# Altium PCB SS_MB_CONV2.0.PcbDoc (part 2 of 4)
Units mil, origin at the board's own origin, x right, y up, seen from the top; angles counter-clockwise.
Board outline 5818.45 x 4760.12 mil, 4 copper layers (Top Layer, Internal Plane 1, Internal Plane 2, Bottom Layer), stack 30.634 mil thick; 381 components, 398 nets, 1514 pads, 801 vias.
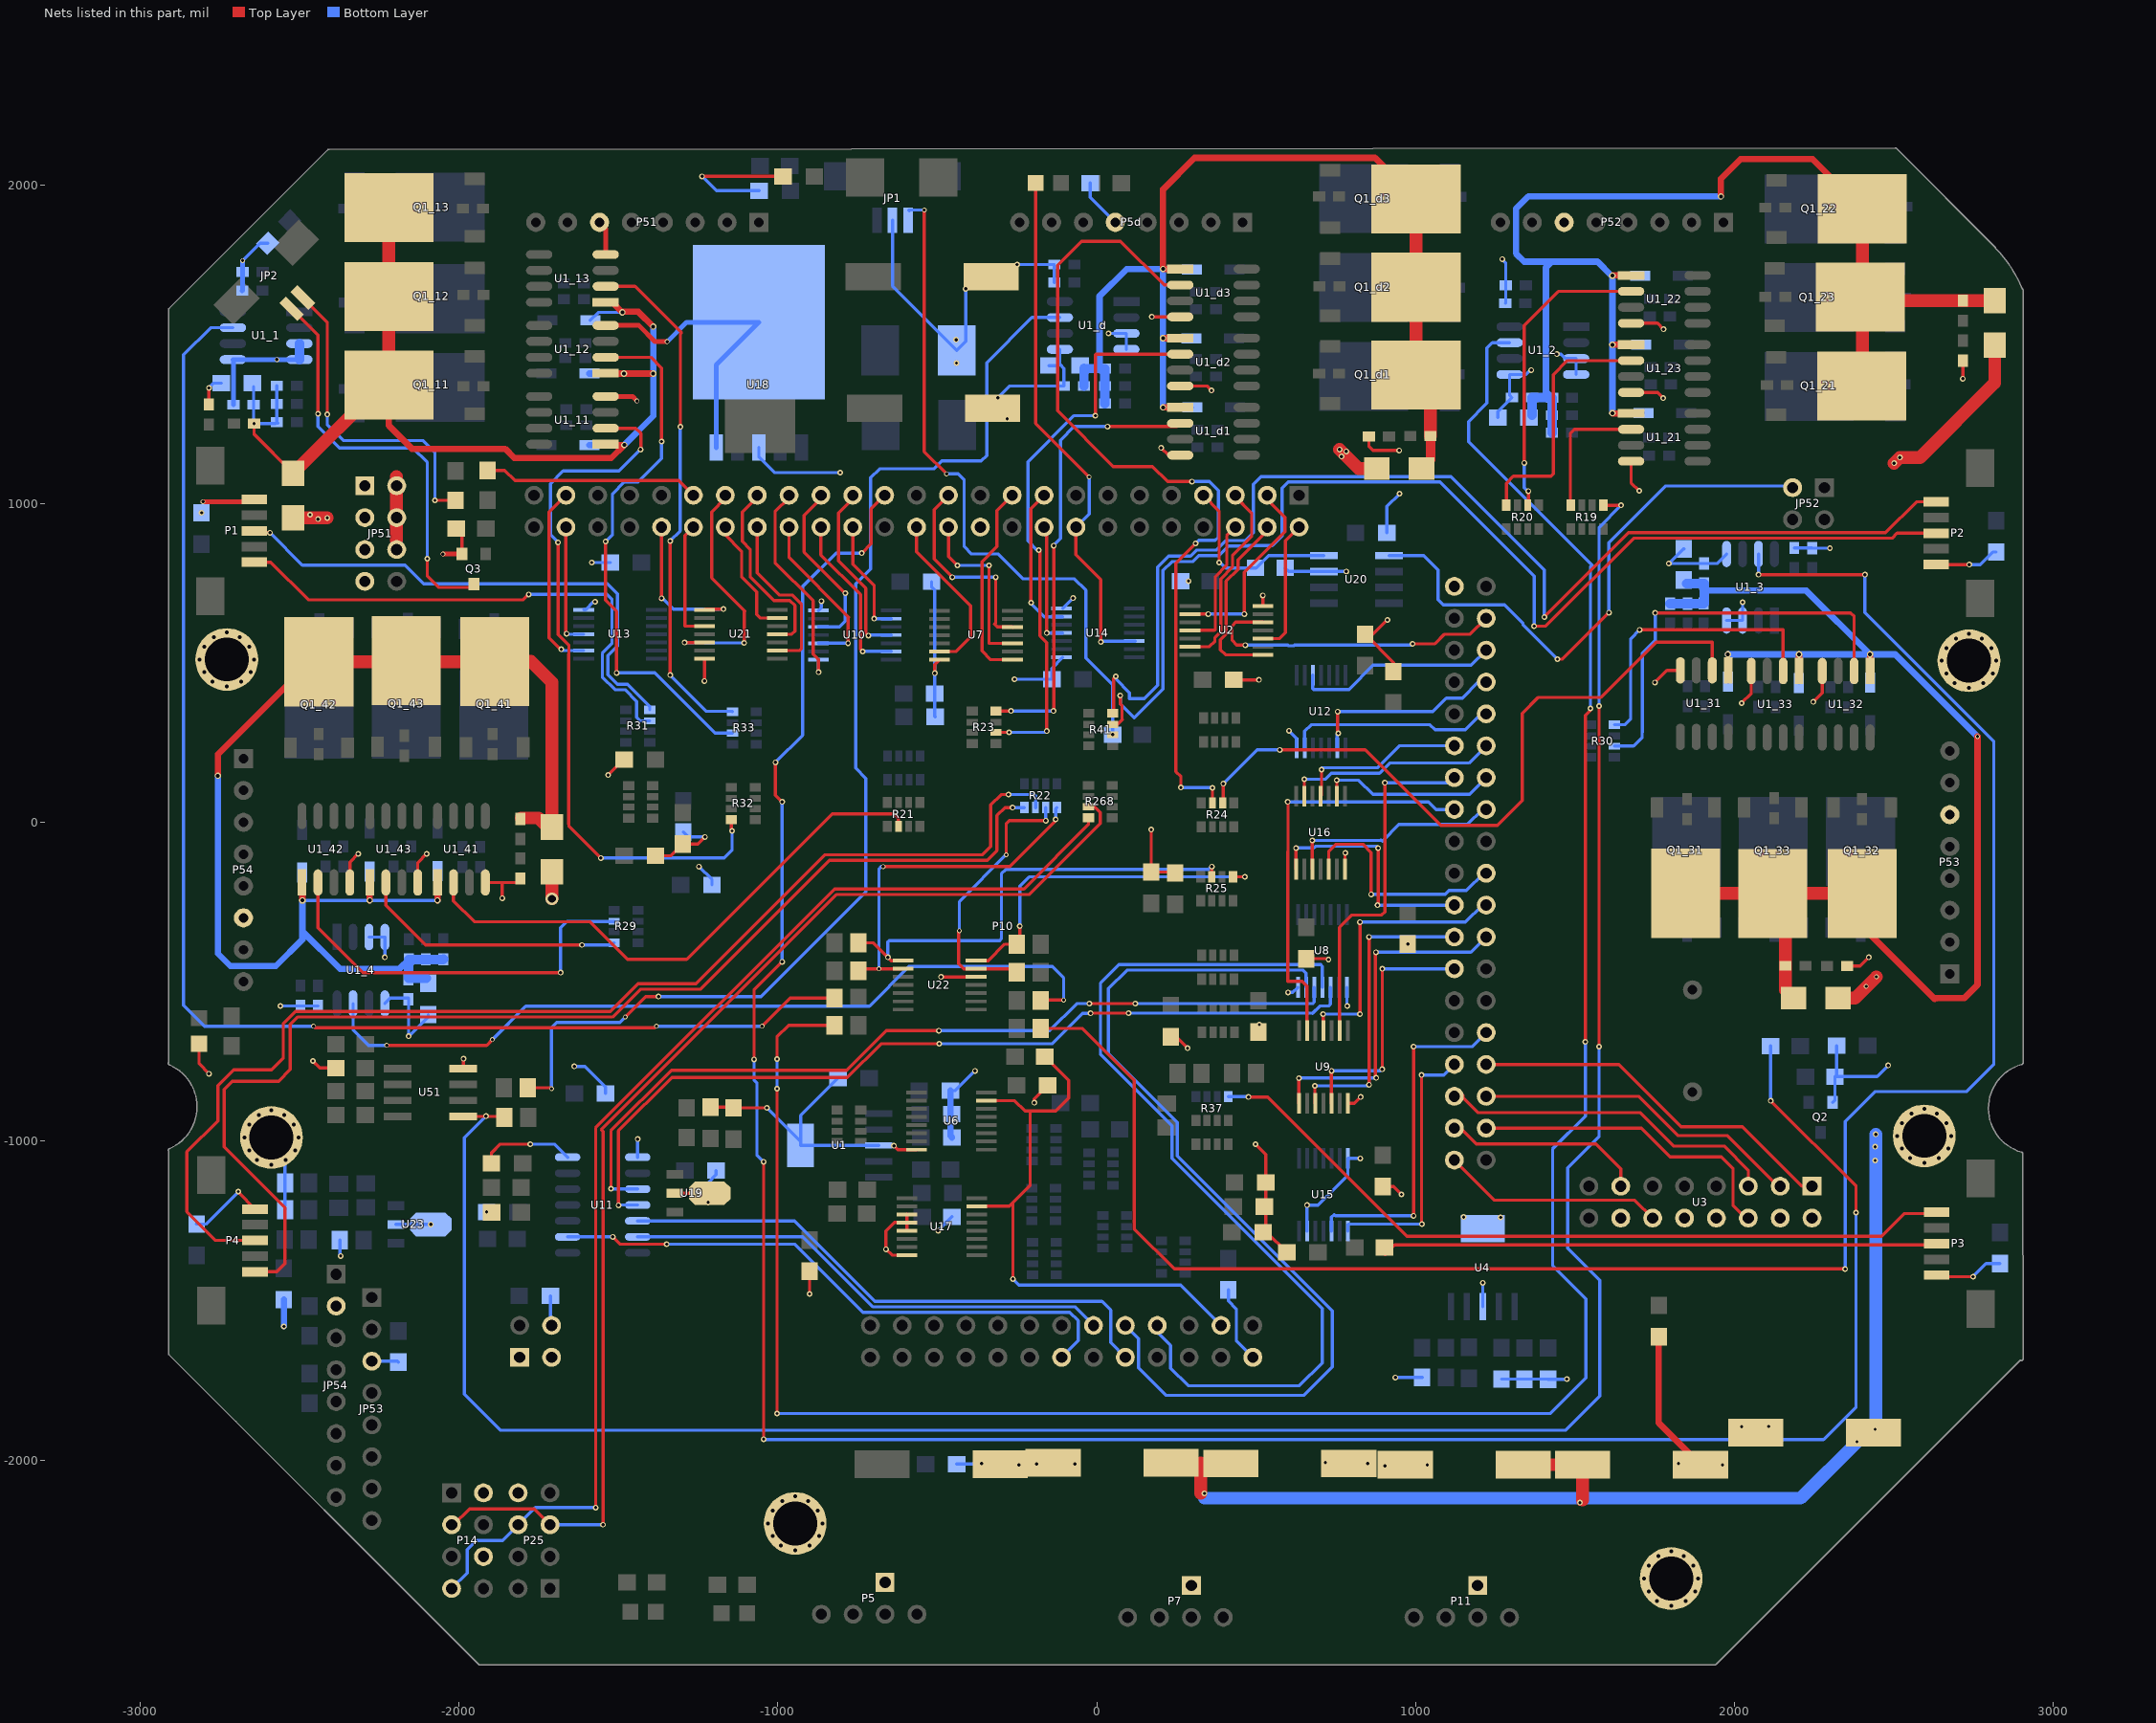
[diagram p4: the nets of this part, all layers, seen from the top]

## Via types
v1: diameter 18, hole 10, Top Layer to Bottom Layer, 606 vias
v2: diameter 25, hole 12, Top Layer to Bottom Layer, 77 vias
v3: diameter 15, hole 10, Top Layer to Bottom Layer, 44 vias
v4: diameter 20, hole 12, Top Layer to Bottom Layer, 43 vias
v5: diameter 50, hole 30, Top Layer to Bottom Layer, 28 vias
v6: diameter 30, hole 20, Top Layer to Bottom Layer, 1 vias
v7: diameter 40, hole 25, Top Layer to Bottom Layer, 1 vias
v8: diameter 30, hole 16, Top Layer to Bottom Layer, 1 vias

## Nets (pads, with @x,y where several pads share a name; then routed paths per layer and width w, separated by ;. In a path a pad name is that pad's centre, name@x,y a point inside that pad or via, vN(x,y) a via of type N, cw(c..) or ccw(c..) an arc to the next point about the centre after c; other vN are vias at no path point) (continued)
+16V2: C70.1 C71.1 C72.1 C73.1 C74.1 F2_1.1 F2_2.1 F2_3.1 F2_4.1 F2_d.1 JP51.2 JP51.4 JP51.6 | length 4734
  Top Layer w20: v1(1516,-2134) 1524,-2126
  Top Layer w40: F2_1.1@-2521,956 v1(-2414,956) ; JP51.6@-2197,885 JP51.2@-2197,1085 ; v7(-1708.73,-239.27) F2_4.1@-1708.73,-153.9 ; 326,-2105 326,-2009 ; v1(762,1171) 822,1111 F2_d.1@879,1111 ; C74.1@1338,-2015 C73.1@1524,-2015 1524,-2126 ; F2_3.1@2326,-551.06 2379,-551.06 v3(2446,-484.06) ; v1(2501.5,1127.87) v1(2519.63,1146) 2583,1146 2817,1380 F2_2.1@2817,1498
  Bottom Layer w40: 338,-2120 2208,-2120 v1(2385,-1943) 2444,-1884 v1(2444,-978)
  other v1: 338,-2105 2442,-1904 2442,-1060 2442,-1017 -2443,952 -2468,966 768,1149 783,1165
  other v3: 2414,-514
+16V2_1: C3_11.2 C3_12.2 C3_13.2 C78_1.2 C79_1.2 D1_11.A D1_12.A D1_13.A F2_1.2 LED1_1.1 Q1_11.2 Q1_12.2 Q1_13.2 U1_11.1 U1_12.1 U1_13.1 | length 3544.8
  Top Layer w10: v1(-2643.5,1252) -2643.5,1218.5 F2_1.2@-2521,1096 ; U1_11.1@-1540.34,1187.36 U1_11.1@-1537.98,1185 ; U1_12.1@-1540.34,1410 U1_12.1@-1539.34,1409
  Top Layer w20: Q1_11.2@-2220.69,1373 -2220.69,1245.69 -2148,1173 -1856,1173 -1827,1144 -1523,1144 v4(-1482,1185) U1_11.1@-1537.98,1185 ; U1_13.1@-1540.34,1632.64 -1519.68,1632.64 v4@-1490.04,1603 ; U1_12.1@-1539.34,1409 v4(-1483,1409) v4(-1391,1409) ; v4(-1488,1600.96) v4@-1490.04,1603 ; v4(-1391,1556.32) -1437.68,1603 v4@-1490.04,1603
  Top Layer w40: F2_1.2@-2521,1096 -2244,1373 Q1_11.2@-2220.69,1373 Q1_12.2@-2220.69,1650.96 Q1_13.2@-2220.69,1929.96
  Bottom Layer w10: C78_1.2@-2645,1368.5 C79_1.2@-2645,1311.5 -2645,1253.5 v1(-2643.5,1252) -2576.5,1252 C3_13.2@-2572,1256.5 ; C3_12.2@-2572,1370.5 C3_11.2@-2572,1313.5 C3_13.2@-2572,1256.5 ; C3_13.2@-2569,1253.5 C3_13.2@-2572,1256.5 ; D1_13.A@-1589,1576 -1564.04,1600.96 v4(-1488,1600.96)
  Bottom Layer w20: D1_11.A@-1592,1185 v4(-1482,1185) -1391,1276 v4(-1391,1409) v4(-1391,1556.32) ; D1_12.A@-1592,1409 v4(-1483,1409)
+16V2_2: C3_21.2 C3_22.2 C3_23.2 C78_2.2 C79_2.2 D1_21.A D1_22.A D1_23.A F2_2.2 LED1_2.1 Q1_21.2 Q1_22.2 Q1_23.2 U1_21.1 U1_22.1 U1_23.1 | length 4263.8
  Top Layer w20: v4(1618,1285) 1619,1284 U1_21.1@1676.34,1284 ; v4(1618,1499.7) U1_23.1@1676.34,1499.7 ; v4(1618,1716) 1619,1717 U1_22.1@1676.34,1717 ; v4(1958,1965) 1958,2020 2020,2082 2245.65,2082 Q1_22.2@2401.69,1925.96
  Top Layer w40: Q1_23.2@2395.69,1649.04 2401.69,1649.04 Q1_22.2@2401.69,1925.96 ; Q1_21.2@2420.5,1349.99 Q1_21.2@2400.45,1370.04 2401.69,1371.28 2401.69,1637.5 LED1_2.1@2717,1637.5 2717.5,1638 F2_2.2@2817,1638
  Bottom Layer w10: v4@1615.3,1499.7 v4(1618,1499.7) D1_23.A@1708.14,1499.7 ; v4(1618,1285) D1_21.A@1715,1285 ; v4(1618,1716) D1_22.A@1705.14,1716
  Bottom Layer w20: C3_23.2@1428.5,1333 1427.84,1333.66 1409,1352.5 1409,1742 1427,1760 ; v4(1618,1285) v4(1618,1499.7) v4@1618,1713.3 ; v4(1618,1716) 1615,1716 1571,1760 1427,1760 ; v4@1956,1965 1354,1965 1315,1926 1315,1786 1341,1760 1427,1760
  Bottom Layer w30: C78_2.2@1365.5,1278.66 C79_2.2@1365.5,1333.66 C3_23.2@1427.84,1333.66 ; C3_22.2@1428,1223.37 1428.5,1223.87 C3_23.2@1428.5,1333
+16V2_3: C3_31.2 C3_32.2 C3_33.2 C78_3.2 C79_3.2 D1_31.A D1_32.A D1_33.A F2_3.2 LED1_3.1 Q1_31.2 Q1_32.2 Q1_33.2 U1_31.1 U1_32.1 U1_33.1 | length 4349.4
  Top Layer w10: v4@1980,530.94 v4(1980,527.94) 1980,478.6 U1_31.1@1981,477.6 ; U1_33.1@2203,475.97 U1_33.1@2203.36,475.61
  Top Layer w20: U1_33.1@2203,475.97 v4(2203,527.94) ; Q1_32.2@2400.96,-222.58 2400.96,-325.96 2629,-554 2632,-551 2721,-551 2763,-509 v3(2763,270.08) ; U1_32.1@2426,475.61 v4(2426,527.94)
  Top Layer w40: Q1_31.2@1847.04,-221.74 Q1_32.2@2400.12,-221.74 ; Q1_33.2@2160.5,-262.2 LED1_3.1@2160.5,-449.06 2160.5,-525.56 F2_3.2@2186,-551.06
  Bottom Layer w10: D1_31.A@1980,441.94 v4(1980,527.94) ; D1_33.A@2203,437.94 v4(2203,527.94) ; D1_32.A@2426,439.94 v4(2426,527.94)
  Bottom Layer w20: 1905.63,728 2225.94,728 v4(2426,527.94) ; v4(1980,527.94) v4(2203,527.94) v4(2426,527.94) ; v3(2763,270.08) 2505.14,527.94 v4(2426,527.94)
  Bottom Layer w30: C3_32.2@1798.37,686.94 C3_31.2@1853.37,686.94 1903.5,686.94 C3_33.2@1904,687.44 1905.63,689.06 1905.63,728 C79_3.2@1905.63,749.94 C78_3.2@1851,749.94
+16V2_4: C3_41.2 C3_42.2 C3_43.2 C78_4.2 C79_4.2 D1_41.A D1_42.A D1_43.A F2_4.2 LED1_4.1 Q1_41.2 Q1_42.2 Q1_43.2 U1_41.1 U1_42.1 U1_43.1 | length 4301.6
  Top Layer w10: U1_42.1@-2493,-188 U1_42.1@-2492,-189 ; U1_43.1@-2281,-189 U1_43.1@-2280,-188 ; F2_4.2@-1726,-11 F2_4.2@-1708.73,-11
  Top Layer w20: v4(-2757,147) -2757,214 -2466.31,504.69 Q1_42.2@-2439.96,504.69 ; v4(-2492,-244) U1_42.1@-2492,-189 ; v4(-2281,-244) U1_43.1@-2281,-189 ; v4(-2068,-244) U1_41.1@-2068,-188
  Top Layer w40: Q1_42.2@-2439.96,504.69 -1890.04,504.69 Q1_41.2@-1889.04,505.69 -1774.69,505.69 -1708.73,439.73 -1708.73,-11 F2_4.2@-1708.73,-13.9 ; LED1_4.1@-1806,14.5 -1751.5,14.5 F2_4.2@-1726,-11
  Bottom Layer w10: D1_42.A@-2492,-157 v4(-2492,-244) v4(-2281,-244) ; D1_43.A@-2281,-153 v4(-2281,-244) ; D1_41.A@-2068,-152 v4(-2068,-244) v4(-2281,-244)
  Bottom Layer w20: v4(-2757,147) -2757,-411 -2717.94,-450.06 -2575.06,-450.06 -2492,-367 -2492,-341 ; v4(-2492,-244) -2492,-341 ; C3_42.2@-2158,-429.5 -2187.23,-458.73 -2374.27,-458.73 -2492,-341
  Bottom Layer w30: C78_4.2@-2103.5,-488 -2158.5,-488 -2158,-487.5 C3_42.2@-2158,-429.5 -2050,-429.5 C3_43.2@-2049.5,-429
+16V2_d: C3_d1.2 C3_d2.2 C3_d3.2 C78_d.2 C79_d.2 D1_d1.A D1_d2.A D1_d3.A F2_d.2 LED1_d.1 Q1_d1.2 Q1_d2.2 Q1_d3.2 U1_d1.1 U1_d2.1 U1_d3.1 | length 3623.6
  Top Layer w10: U1_d2.1@262,1519.96 U1_d2.1@262,1519.96
  Top Layer w20: v4(208,1302.96) U1_d1.1@262,1302.96 ; v4(208,1520) U1_d2.1@262,1519.96 ; U1_d3.1@262,1736.96 v4(208,1736.96) 208,1987 306.88,2085.88 872.85,2085.88 Q1_d3.2@1001.69,1957.04
  Top Layer w30: F2_d.2@1019,1111 1047,1139 LED1_d.1@1047,1213
  Top Layer w40: Q1_d3.2@1001.69,1957.04 Q1_d2.2@1001.69,1679.96 Q1_d1.2@1001.69,1404.96 1047,1359.65 LED1_d.1@1047,1213
  Bottom Layer w10: v4(208,1302.96) D1_d1.A@300.14,1303 D1_d1.A@300.14,1303 ; v4(208,1520) D1_d2.A@297.14,1519.96 D1_d2.A@297.14,1519.96 ; v4(208,1736.96) 297.18,1736.96 D1_d3.A@298.14,1736
  Bottom Layer w20: C78_d.2@-40,1425 9,1425 9,1652 93.96,1736.96 v4(208,1736.96) v4(208,1520) v4(208,1302.96)
  Bottom Layer w30: C79_d.2@-40,1370 -40,1425 -39.7,1424.7 C3_d2.2@26,1424.7 C3_d1.2@26,1369.7 C3_d3.2@26,1314.7
AB_1_F: P10.42 U21.1 | length 484
  Top Layer w10: v1@-1368,701 v1(-1365,704) -1365,926.96 P10.42@-1365.19,927.15 ; U21.1@-1230.5,667.77 -1228.23,670.04 v1(-1171,670.04)
  Bottom Layer w10: v1(-1365,704) -1361.87,704 -1327.87,670 -1183,670
AB_2_F: P10.147 U2.5 | length 986.9
  Top Layer w10: v1(466,557) 439,557 424.6,571.4 424.6,617.6 435.77,628.77 U2.5@521,628.77 ; v1(991,561) 1061,561 1091,591 1171.66,591 P10.147@1221.81,641.15
  Bottom Layer w10: v1(466,557) 599.3,557 601.3,555 618.7,555 620.7,557 987,557 v1(991,561)
AB_3_F: P10.138 U9.9 | length 1115.3
  Top Layer w10: U9.9@762,-652.5 762,-329 801,-290 894,-290 904,-280 v1(904,125)
  Bottom Layer w10: v1(904,125) 1105.66,125 P10.138@1121.81,141.15
AB_4_F: P10.32 U10.13 | length 533.7
  Top Layer w10: P10.32@-865.19,927.15 -865.19,839.81 -741,715.62 -741,544 v1(-734,537)
  Bottom Layer w10: v1(-734,537) -733.59,537.41 U10.13@-645,537.41
AB_DB_F: P10.140 U16.11 | length 536.2
  Top Layer w10: U16.11@702,82.5 705,85.5 v1(705,166)
  Bottom Layer w10: v1(705,166) 705,172 880,172 949.15,241.15 P10.140@1121.81,241.15
AD_/CS: P10.85 U11.2 | length 1847.4
  Top Layer w10: v1(-1518,-1300) -1495,-1323 v1(-1349,-1323)
  Bottom Layer w10: U11.2@-1660,-1300 v1(-1518,-1300) ; v1(-1349,-1323) -947,-1323 -733.68,-1536.32 -84.68,-1536.32 -58,-1563 -58,-1625.66 P10.85@-110.19,-1677.85
AD_CLK: P10.89 U11.12 | length 1766.8
  Bottom Layer w10: U11.12@-1440,-1250 -948,-1250 -695.68,-1502.32 16.32,-1502.32 44,-1530 44,-1632.04 P10.89@89.81,-1677.85
AD_DI: P10.88 U11.13 | length 1544.9
  Bottom Layer w10: U11.13@-1440,-1300 -922.04,-1300 -702.72,-1519.32 -68.72,-1519.32 P10.88@-10.19,-1577.85
AD_DO: U8.5 U11.10 | length 2685.9
  Top Layer w10: v1(-1524,-1149) -1524,-967 -1334,-777 -784,-777 -660,-653 v1(-495,-653) ; v1(-23,-568) v1(121,-568)
  Bottom Layer w10: v1(-1524,-1149) -1523,-1150 U11.10@-1440,-1150 ; v1(-495,-653) -148.19,-653 -63.19,-568 v1(-23,-568) ; v1(121,-568) 677,-568 682.23,-562.77 U8.5@682.23,-517
AD_DO_F: P10.90 U8.6 | length 3000.7
  Bottom Layer w10: P10.90@89.81,-1577.85 131,-1619.04 131,-1659.97 131.34,-1660.31 131.34,-1711.34 217,-1797 650,-1797 739,-1708 739,-1532 253,-1046 253,-941 37,-725 37,-521 95,-463 647.35,-463 656.64,-472.29 U8.6@656.64,-517
AD_SARS: U8.3 U11.11 | length 2745.2
  Top Layer w10: v1(-1500,-1201) -1500,-967.04 -1332.96,-800 -782.96,-800 -676.96,-694 v1(-494,-694) ; v1(-19.28,-598.28) -19,-598 v1(100,-598)
  Bottom Layer w10: v1(-1500,-1201) -1499,-1200 U11.11@-1440,-1200 ; v1(-494,-694) -140.2,-694 -44.48,-598.28 v1(-19.28,-598.28) ; v1(100,-598) 676.44,-598 676.72,-598.28 699.59,-575.41 727.59,-575.41 733.41,-569.59 U8.3@733.41,-517
AD_SARS_F: P10.92 U8.4 | length 2947.6
  Bottom Layer w10: P10.92@189.81,-1577.85 189.81,-1598.81 232,-1641 232,-1712.19 286.81,-1767 636,-1767 707,-1696 707,-1524.04 236,-1053.04 236,-952 11.8,-727.8 11.8,-503.2 69,-446 703,-446 707.82,-450.82 U8.4@707.82,-517
AT_1_F: P10.40 U21.3 | length 382.5
  Top Layer w10: P10.40@-1265.19,927.15 -1291.5,900.84 -1291.5,616.59 U21.3@-1230.5,616.59
AT_2_F: P10.2 U2.3 | length 427.5
  Top Layer w10: U2.3@521,577.59 573.59,577.59 592,596 592,884.34 P10.2@634.81,927.15
AT_3_F: P10.136 U9.13 | length 1303.1
  Top Layer w10: v1(599,65) 600,64 600,-90.28 599,-91.28 599,-498 645,-498 659.64,-512.64 U9.13@659.64,-652.5
  Bottom Layer w10: v1(599,65) 1040.3,65 1064.15,41.15 P10.136@1121.81,41.15
AT_4_F: P10.30 U10.9 | length 368.1
  Top Layer w10: P10.30@-765.19,927.15 -765.19,810.19 -698,743 v1(-698,640)
  Bottom Layer w10: v1(-698,640) -645.23,640 U10.9@-645,639.77
AT_DB_F: P10.139 U16.13 | length 667.9
  Top Layer w10: U16.13@650.82,82.5 651,82.68 v1(651,136)
  Bottom Layer w10: v1(651,136) 716.41,136 735.41,155 887.04,155 919.04,187 1167.66,187 P10.139@1221.81,241.15
BB_1_F: P10.37 U21.5 | length 776.5
  Top Layer w10: v1(-1293,565) -1230.91,565 U21.5@-1230.5,565.41 ; P10.37@-1165.19,1027.15 -1165.19,1017.81 -1208,975 -1208,768 -1104,664 -1106,662 v1(-1106,564)
  Bottom Layer w10: v1(-1293,565) -1291,567 -1288,564 v1(-1106,564)
BB_2_F: P10.4 U2.1 | length 609.6
  Top Layer w10: U2.1@521,526.41 403.59,526.41 388,542 388,573.92 406.23,592.15 406.23,657.77 406.05,657.95 406.05,757.68 443,794.63 443,824 534.81,915.81 P10.4@534.81,927.15 P10.4@558.81,927.15
BB_3_F: P10.129 U9.11 | length 877.7
  Top Layer w10: v1(710,-601) 710,-651.68 U9.11@710.82,-652.5 ; v1(826,-601) v1(826,-312)
  Bottom Layer w10: v1(710,-601) v1(826,-601) ; v1@823,-312 v1(826,-312) 1157,-312 1210.15,-258.85 P10.129@1221.81,-258.85
BB_4_F: P10.29 U10.11 | length 569.3
  Top Layer w10: P10.29@-765.19,1027.15 -765.19,1016.81 -810,972 -810,821 -724,735 -724,595 v1(-716,587)
  Bottom Layer w10: v1(-716,587) -714.41,588.59 U10.11@-645,588.59
BB_DB_F: P10.135 U16.3 | length 680.4
  Top Layer w10: v1(676,-56) 676,-143.59 675,-144.59 U16.3@676.41,-146
  Bottom Layer w10: v1(676,-56) 890,-56 891,-55 892,-56 893,-55 896,-58 948,-6 1163,-6 1210.15,41.15 P10.135@1221.81,41.15
BT_1_F: P10.38 U21.13 | length 384.5
  Top Layer w10: P10.38@-1165.19,927.15 -1165.19,903.19 -1114,852 -1114,771.04 -1067,724.04 -1067,653 -1056,642 -1002.18,642 U21.13@-1002,642.18
BT_2_F: P10.3 U2.9 | length 618.8
  Top Layer w10: U2.9@292.5,654.36 v1(349.82,654.36) ; v1(463,654.36) 463,786 590,913 590,958 534.81,1013.19 P10.3@534.81,1027.15
  Bottom Layer w10: v1(349.82,654.36) v1(463,654.36)
BT_3_F: P10.127 U9.1 | length 1087.1
  Top Layer w10: v1(634,-802) U9.1@634.05,-881 U9.1@634.05,-881 ; v1(876,-407) 874.64,-407 874.15,-406.51 874.15,-800.15 875,-801 v1(877,-801)
  Bottom Layer w10: v1(634,-802) 635,-801 v1(877,-801) ; v1(876,-407) 1173.66,-407 P10.127@1221.81,-358.85
BT_4_F: P10.31 U10.5 | length 562.4
  Top Layer w10: P10.31@-865.19,1027.15 -865.19,1016.81 -918,964 -918,849 v1(-788.96,719.96)
  Bottom Layer w10: U10.5@-873.5,614.18 -806.82,614.18 -788.96,632.04 v1(-788.96,719.96)
BT_DB_F: P10.137 U16.9 | length 560.8
  Top Layer w10: v1(753,133) 753,133.64 753.18,133.82 U16.9@753.18,82.5
  Bottom Layer w10: v1(753,133) 822,133 866,89 1169.66,89 P10.137@1221.81,141.15
BUZZER: P10.27 R3.1 | length 7922.5
  Top Layer w10: v1(-1075,-743) -1075,-525 v1(-987,-437) ; v1(-1045,-1935) v1(-1045,-1064) ; v1(-1008,189) -1008,86 v1(-987,65) ; v1(-737,845.81) -708,874.81 -708,984.34 P10.27@-665.19,1027.15 ; v1(2114,-873) 2382,-1141 v1(2382,-1224)
  Bottom Layer w10: v1(-1075,-743) -1075,-807 -1066,-816 -1066,-1043 v1(-1045,-1064) ; v1@-1045,-1936 2280,-1936 2382,-1834 v1(2382,-1224) ; v1(-1008,189) -923,274 -923,741 -818.19,845.81 v1(-737,845.81) ; v1(-987,-437) v1(-987,65) ; v1(2114,-873) R3.1@2114,-701
C_CE: P10.114 U3.12 | length 697.6
  Top Layer w10: P10.114@1121.81,-1058.85 1247.96,-1185 1688,-1185 U3.12@1744,-1241
C_CLK1: P10.117 U3.3 | length 1039.1
  Top Layer w10: P10.117@1221.81,-858.85 1699.67,-858.85 1822.82,-982 1977,-982 2136,-1141 U3.3@2144,-1141
C_CS: P10.115 U3.6 | length 1007
  Top Layer w10: P10.115@1221.81,-958.85 1708.85,-958.85 1798.7,-1048.7 1959.7,-1048.7 1996,-1085 1996,-1201 2036,-1241 U3.6@2044,-1241
C_DATA: P10.119 U3.1 | length 1189.1
  Top Layer w10: P10.119@1221.81,-758.85 1637.85,-758.85 1833,-954 2025,-954 2212,-1141 U3.1@2244,-1141
  Bottom Layer w10: P10.119@1213.15,-758.85 P10.119@1221.81,-758.85
C_DR1: P10.118 U3.5 | length 1068.3
  Top Layer w10: P10.118@1143.85,-858.85 1195,-910 1704,-910 1809,-1015 1968,-1015 2044,-1091 U3.5@2044,-1141
  Top Layer w20: P10.118@1121.81,-858.85 P10.118@1143.85,-858.85
C_PWR: P10.116 U3.13 | length 629.9
  Top Layer w10: P10.116@1121.81,-958.85 1141.85,-958.85 1191,-1008 1566,-1008 1644,-1086 U3.13@1644,-1141
CB_1_F: P10.35 U21.11 | length 602
  Top Layer w10: P10.35@-1065.19,1027.15 -1065.19,1020.81 -1112,974 -1112,883 -1087,858 -1087,771.5 -1012.5,697 -963,697 -947,681 -947,601 -957,591 U21.11@-1002,591
CB_2_F: P10.6 U2.11 | length 428
  Top Layer w10: U2.11@292.5,603.18 369.18,603.18 372.23,606.23 372.23,637.06 372.05,637.24 372.05,771.76 408,807.72 408,900.34 P10.6@434.81,927.15
CB_3_F: P10.128 U9.3 | length 958.4
  Top Layer w10: v1(684,-826) 684,-879.77 U9.3@685.23,-881 ; v1(854.15,-822.39) v1(854.15,-358.85)
  Bottom Layer w10: v1(684,-826) 850.54,-826 v1(854.15,-822.39) ; v1(854.15,-358.85) P10.128@1121.81,-358.85
CB_4_F: P10.34 U10.3 | length 536
  Top Layer w10: P10.34@-965.19,927.15 -965.19,831.19 -778,644 -780,642 v1(-780,563)
  Bottom Layer w10: U10.3@-873.5,563 v1(-780,563)
CB_DB_F: P10.130 U16.1 | length 762.7
  Top Layer w10: v1(625,-80) 625,-76.46 625.23,-76.23 U16.1@625.23,-146 ; v1(881,-259) 883,-257 v1(883,-80)
  Bottom Layer w10: v1(625,-80) v1@625,-79 ; v1@625,-78.23 v1@625,-79 ; v1@877,-259 v1(881,-259) 1121.66,-259 P10.130@1121.81,-258.85 ; v1(883,-80) 877,-74 687.7,-74 684.7,-77 682.7,-77 680.7,-79 v1@625,-79
CE: P14.7 P25.6 R268.2 | length 3773.1
  Top Layer w10: P14.7@-2023.83,-2403.22 P14.7@-2003.83,-2403.22 ; v1(-1572,-2149.22) -1572,-958 -822.5,-208.5 -228.38,-208.5 -26,-6.12 R268.2@-26,15
  Bottom Layer w10: P14.7@-2023.83,-2403.22 -1975,-2354.39 -1975,-2281.22 -1947,-2253.22 -1864,-2253.22 -1815,-2204.22 P25.6@-1815,-2203.22 -1761,-2149.22 v1(-1572,-2149.22)
CHIP: JP52.2 U20.5 | length 1814.2
  Top Layer w10: v1(1445,513) 1461,513 v1(1607,659)
  Bottom Layer w10: U20.5@917.25,838 1026,838 1071,793 1071,699 1087,683 1280,683 1337,626 1337,621.58 1445,513.58 v1(1445,513) ; v1(1607,659) 1607,879 1784,1056 2178,1056 JP52.2@2183,1051
CHIP_F: P10.7 R191.2 U20.4 | length 583.2
  Top Layer w10: P10.7@334.81,1027.15 384,977.96 v1(384,816)
  Bottom Layer w10: v1(384,816) 388,816 405,799 R191.2@498,799 499.82,799 538.82,838 U20.4@712.52,838
CON1_RESET: P10.96 R40.1 U6.15 U17.15 | length 1830.4
  Top Layer w10: U17.15@-376.5,-1203.82 -273.57,-1203.82 -263,-1193.25 ; U6.15@-346.5,-872.82 -257,-872.82 -225.01,-904.8 -209,-904.8 ; v1(-263,-1432) -263,-1193.25 ; R40.1@-163,-734 -88,-809 -88,-864 -128.8,-904.8 -209,-904.8 ; -263,-1193.25 -209,-1139.25 -209,-904.8
  Bottom Layer w10: v1(-263,-1432) -243.68,-1451.32 263.28,-1451.32 P10.96@389.81,-1577.85
CSN11: P14.3 P25.5 R268.4 | length 3805.9
  Top Layer w10: P14.3@-2023.83,-2203.22 -2018,-2203.22 -1968,-2153.22 -1765,-2153.22 P25.5@-1715,-2203.22 ; v1(-1549,-2203.22) -1549,-969.04 -1554,-964.04 -815.46,-225.5 -211.5,-225.5 11,-3 11,32 -7,50 R268.4@-26,50
  Bottom Layer w10: P14.3@-2023.83,-2203.22 P14.3@-2018,-2203.22 ; P25.5@-1715,-2203.22 v1(-1549,-2203.22)
CT_1_F: P10.36 U21.9 | length 540.1
  Top Layer w10: P10.36@-1065.19,927.15 -1065.19,783.19 -996,714 -955.96,714 -926.14,684.18 -926.14,546.86 -933.18,539.82 U21.9@-1002,539.82
CT_2_F: P10.5 U2.13 | length 612.3
  Top Layer w10: U2.13@292.5,552 353.28,552 370.59,569.31 370.59,580.55 389.23,599.19 389.23,650.73 389.05,650.91 389.05,764.72 426,801.67 426,838.33 486,898.33 486,972 434.81,1023.19 P10.5@434.81,1027.15
CT_3_F: P10.126 U9.5 | length 809.4
  Top Layer w10: U9.5@736.41,-881 736.41,-776.11 737,-776.7 v1(737,-779) ; v1(895.15,-773.85) 896,-773 v1(896,-459)
  Bottom Layer w10: v1(737,-779) 890,-779 v1(895.15,-773.85) ; v1(896,-459) 1121.66,-459 P10.126@1121.81,-458.85
CT_4_F: P10.33 U10.1 | length 669.7
  Top Layer w10: P10.33@-965.19,1027.15 -965.19,1020.15 -1009,976.34 -1009,815.12 -890,696.12 -890,528.31 -873.5,511.82 -873.5,472.5 v1(-873,472)
  Bottom Layer w10: U10.1@-873.5,511.82 -873,511.31 v1(-873,472)
CT_DB_F: P10.131 U16.5 | length 727.7
  Top Layer w10: U16.5@727.59,-146 727.59,-91.41 751,-68 835,-68 861,-94 v1(861,-225)
  Bottom Layer w10: v1(861,-225) 1093,-225 1105,-213 1160,-213 1214.15,-158.85 P10.131@1221.81,-158.85
CURRENT_1: R95.1 U1_1.7 | length 4341.9
  Top Layer w10: v3(-2457,-639) -2451.86,-644.14 -1386.14,-644.14 v3(-1381,-639) ; v3(-1050,-639) -962,-551 R95.1@-822.4,-551
  Bottom Layer w10: U1_1.7@-2710,1553 -2780,1553 -2865,1468 -2865,-573 -2799,-639 v3(-2457,-639) ; v3(-1381,-639) v3(-1050,-639)
CURRENT_2: R96.1 U1_2.7 | length 7550.3
  Top Layer w10: v1(-1003,-1854) v1(-1003,-835) ; v1(-1003,-742) -1003,-672.64 -966.36,-636 R96.1@-822.4,-636 ; v1(1533,-688) 1533,337 1549,353 v1(1549,358)
  Bottom Layer w10: v1(-1003,-1854) 1424,-1854 1535,-1743 1535,-1494.04 1430,-1389.04 1430,-1024.18 1533,-921.18 v1(1533,-688) ; v1(-1003,-835) v1(-1003,-742) ; U1_2.7@1295.34,1506 1241,1506 1224,1489 1224,1316 1220,1312 1220,1311.82 1167,1258.82 1167,1195.43 1554,808.43 1549,803.43 v1(1549,358)
CURRENT_3: R98.2 U1_3.7 | length 6216.3
  Top Layer w10: R98.2@-175.6,-646 -45,-646 118,-809 118,-1275 243,-1400 2347,-1400 v1(2348,-1401) ; v1(2076,778) v1(2410,778)
  Bottom Layer w10: v1(2076,778) U1_3.7@2076,842.94 ; v1(2348,-1401) 2348,-938 2442,-844 2730,-844 2814,-760 2814,255 2410,659 v1(2410,778)
CURRENT_4: R97.2 U1_4.7 | length 2590.6
  Top Layer w10: v3(-2227,-699) -1914,-699 v3(-1896,-681) ; R97.2@-175.6,-557.83 -174.76,-557 v3(-104,-557)
  Bottom Layer w10: U1_4.7@-2333.04,-567.66 -2333.04,-649.96 -2284,-699 v3(-2227,-699) ; v3(-1896,-681) -1791,-576 -713,-576 -589,-452 -138.67,-452 -104,-486.67 v3(-104,-557)
CURRENT_d: R99.1 U1_d.7 | length 3735.2
  Top Layer w10: R99.1@-1785.6,-832 -1713.46,-832 v3(-1710.46,-835) ; v3(-1479,-610) -1415,-546 v1(-1374.5,-546)
  Bottom Layer w10: v3(-1710.46,-835) -1710.46,-643 -1694.6,-627.14 -1496.14,-627.14 v3(-1479,-610) ; v1(-1374.5,-546) -1053,-546 -724,-217 -724,139 -756,171 -756,749 -709,796 -709,1082 -681,1110 -511,1110 -486,1135 -362,1135 -345,1152 -345,1443 -203,1585 U1_d.7@-115.66,1585
ENCODEA_1: P1.5 R31.3 | length 1676.5
  Top Layer w10: P1.5@-2643,817 -2591,817 -2473,699 -1799.31,699 v1@-1782,716.31
  Bottom Layer w10: v1(-1782,716) -1535.96,716 -1520.98,701.02 -1520.98,561.06 -1551,531.04 -1551,456.98 -1511.02,417 -1479.45,417 -1443,380.55 -1443,330 -1432,319 R31.3@-1402,319
ENCODEA_1_F: P10.48 U13.4 | length 394.3
  Top Layer w10: P10.48@-1665.19,927.15 -1665.19,590.53 -1663,592.72 v1(-1663,593)
  Bottom Layer w10: v1(-1663,593) -1661,591 U13.4@-1609.5,591
ENCODEA_2: P2.5 R41.2 | length 3753.8
  Top Layer w10: R41.2@49.8,343 56,349.2 53,352.2 53,452 v1(60,459) ; v1(1404,645) 1668.47,909.47 2474.47,909.47 2571.64,1006.64 P2.5@2633,1006.64
  Bottom Layer w10: v1(60,459) 60,450.28 103,407.28 103,389.28 103.28,389 148.95,389 191,431.05 191,802 225,836 294.04,836 313.04,855 375,855 405,885 466,885 491,910 491,1061.18 515.5,1085.68 1111.32,1085.68 1404,793 v1(1404,645)
ENCODEA_2_F: P10.18 U14.4 | length 391.2
  Top Layer w10: P10.18@-168.19,927.38 -157,916.19 -161.11,912.07 -156,906.96 -157,905.96 v1(-157,595)
  Bottom Layer w10: v1(-157,595) U14.4@-110.5,595 U14.4@-107,595
ENCODEA_3: P3.5 R37.7 | length 2455.9
  Top Layer w10: v1(476,-861) 536,-861 973,-1298 2462,-1298 2533.15,-1226.85 P3.5@2658,-1226.85
  Bottom Layer w10: R37.7@413,-860 475,-860 v1(476,-861)
ENCODEA_3_F: P10.121 U15.10 | length 1083.4
  Top Layer w10: v1(994,-1234) v1(994,-703)
  Bottom Layer w10: U15.10@736.41,-1282 736.41,-1238.41 744.82,-1230 748.82,-1234 v1(994,-1234) ; v1(994,-703) 1177.66,-703 P10.121@1221.81,-658.85
ENCODEA_4: P4.5 R22.7 | length 3753.9
  Top Layer w10: P4.5@-2640.57,-1409.43 -2572.43,-1409.43 -2546.4,-1383.4 -2546.4,-1207.6 -2737,-1017 -2737,-837 -2711.5,-811.5 -2566.65,-811.5 -2529.92,-774.77 -2529.92,-633.08 -2506.98,-610.14 -1519.06,-610.14 -1431.92,-523 -1243.5,-523 -838.5,-118 -343.23,-118 -312.8,-87.57 -312.8,22.2 -287.8,47.2 v1(-263.71,47.2)
  Bottom Layer w10: v1(-263.71,47.2) R22.7@-227,47.2
ENCODEA_4_F: P10.19 U7.8 | length 634.4
  Top Layer w10: P10.19@-265.19,1027.15 -313,979.34 -313,865.67 -360,818.67 -360,539 -332.23,511.23 U7.8@-264.5,511.23
ENCODEB_1: P1.3 R31.1 | length 1676.2
  Top Layer w10: P1.3@-2651.43,909.43 v1(-2593.43,909.43)
  Bottom Layer w10: v1(-2593.43,909.43) -2492,808 -2170,808 -2111,749 -1535.19,749 -1503.98,717.79 -1503.98,554.02 -1534,524 -1534,464.02 -1503.98,434 -1472.41,434 -1402,363.59 R31.1@-1402,354
ENCODEB_1_F: P10.47 U13.2 | length 594.4
  Top Layer w10: v1(-1680,544) -1682,544 -1718,580 -1718,974.34 P10.47@-1665.19,1027.15
  Bottom Layer w10: v1(-1680,544) -1680,543.64 -1676.18,539.82 U13.2@-1609.5,539.82
ENCODEB_2: P2.3 R41.4 | length 3730.3
  Top Layer w10: R41.4@49.8,308 65,308 80,323 79.13,323.87 79.52,324.25 79.52,367.21 74,372.73 v1(74,399) ; v1(1372,616.59) 1408.59,616.59 1684.47,892.47 2495.05,892.47 2510.79,908.21 P2.3@2633,908.21
  Bottom Layer w10: v1(74,399) 74,372.73 117.73,329 208,419.27 208,791 236,819 301.08,819 320.08,838 383,838 413,868 473.04,868 474.04,869 550.72,869 581,899.28 581,1049.36 600.31,1068.68 1076.32,1068.68 1372,773 v1(1372,616.59)
ENCODEB_2_F: P10.17 U14.6 | length 477
  Top Layer w10: v1(-206,690) -206,688 -206.72,688.72 -206.72,985.62 P10.17@-165.19,1027.15
  Bottom Layer w10: v1(-206,690) -206,688 -164.18,646.18 U14.6@-110.5,646.18 U14.6@-107,646.18
ENCODEB_3: P3.3 R42.2 | length 1743.9
  Top Layer w10: R42.2@904,-1356 934.72,-1325.28 P3.3@2635.2,-1325.28
ENCODEB_3_F: P10.120 U15.8 | length 838.8
  Top Layer w10: v1(1019,-792) 1019,-1257 1021,-1259 v1(1020,-1260)
  Bottom Layer w10: U15.8@787.59,-1282 787.59,-1262.41 790,-1260 v1(1020,-1260) ; v1(1019,-792) 1088.66,-792 P10.120@1121.81,-758.85
ENCODEB_4: P4.3 R22.5 | length 3809
  Top Layer w10: P4.3@-2640.57,-1311 -2764,-1311 -2854,-1221 -2854,-1033 -2757,-936 -2757,-825 -2708,-776 -2588,-776 -2552,-740 -2552,-631.12 -2513.88,-593 -1525.96,-593 -1438.96,-506 -1257,-506 -852,-101 -358,-101 -332.23,-75.23 -332.23,55.77 -300,88 v1(-277,88)
  Bottom Layer w10: v1(-277,88) -196,88 -192,84 R22.5@-192,47.2
ENCODEB_4_F: P10.24 U7.10 | length 548.3
  Top Layer w10: P10.24@-465.19,927.15 -465.19,835.19 v1(-437,807) ; v1(-338,807) -338,563.41 -337,562.41 U7.10@-264.5,562.41
  Bottom Layer w10: v1(-437,807) v1(-338,807)
FAULT_1: R22.1 R100.1 U22.2 | length 1116.6
  Top Layer w10: R100.1@-747.6,-465 -741.33,-458.73 U22.2@-607,-458.73 ; v3(-670,-138) -273,-138 -129,6 v1(-129,10)
  Bottom Layer w10: v3(-683,-459) -683,-145 -676,-138 v3(-670,-138) ; v1(-129,10) -129,43.2 R22.1@-125,47.2
FAULT_1_F: P10.26 U7.6 | length 530.4
  Top Layer w10: P10.26@-565.19,927.15 -565.19,850 -396,680.81 -396,583 -442.18,536.82 U7.6@-493,536.82
FAULT_2: R25.4 R101.1 U22.1 | length 1478.7
  Top Layer w10: R101.1@-747.6,-377.14 -701.27,-377.14 v1(-655.41,-423) -645.27,-433.14 U22.1@-607,-433.14 ; R25.4@361,-170.2 v1(361,-138)
  Bottom Layer w10: v1(-655.41,-423) -655.41,-374 -651.41,-370 -304,-370 -299,-365 -299,-161 -285,-147 351,-147 360,-138 v1(361,-138)
FAULT_2_F: P10.143 U12.2 | length 621.1
  Top Layer w10: v1(756,348) 756,282 v1(758,280)
  Bottom Layer w10: U12.2@754.59,234 754,234.59 754,276 v1(758,280) ; v1(756,348) 1054,348 1097,391 1147,391 1197.15,441.15 P10.143@1221.81,441.15
FAULT_3: R25.8 R102.1 U22.14 | length 1093.4
  Top Layer w10: U22.14@-378.5,-433.14 -340.14,-433.14 -288.5,-381.5 R102.1@-250.4,-381.5 -241.2,-372.3 v1(-241.2,-324.8) ; R25.8@428,-170.2 v1(464.8,-170.2)
  Bottom Layer w10: v1@-239,-327 v1(-241.2,-324.8) -241.2,-199.39 -212,-170.2 v1(464.8,-170.2)
FAULT_3_F: P10.141 U12.6 | length 657.9
  Bottom Layer w10: U12.6@652.23,234 652.23,286.46 672.77,307 1045,307 1061,291 1156,291 1206.15,341.15 P10.141@1221.81,341.15
FAULT_4: R22.3 R103.1 U22.13 | length 863.7
  Top Layer w10: v3(-431,-339) -433,-341 -433,-443 -417.27,-458.73 U22.13@-378.5,-458.73 -261.34,-458.73 R103.1@-250.4,-469.67 ; v3(-284,-101) -284,-4 -274,6 v1(-160,6)
  Bottom Layer w10: v3(-431,-339) -431,-248 v3(-284,-101) ; v1(-160,6) R22.3@-160,47.2
FAULT_4_F: P10.23 U7.12 | length 646.9
  Top Layer w10: P10.23@-465.19,1027.15 -465.19,1026.81 -510,982 -510,827 v1(-453,770) ; v1(-317,770) -317,626.59 -321,622.59 -312.41,614 -264.91,614 U7.12@-264.5,613.59 U7.12@-262.91,612
  Bottom Layer w10: v1(-453,770) v1(-317,770)
FAULT_DB: R19.8 R104.1 U51.1 | length 7646.3
  Top Layer w10: U51.1@-1988,-922 -1861.59,-922 R104.1@-1858.59,-925 ; v1(1576,-703) v1(1576,366) ; R19.8@1589,995.8 v1(1644.8,995.8)
  Bottom Layer w10: v1(-1916,-921) -1984,-989 -1984,-1793.4 -1870.4,-1907 1470.35,-1907 1578,-1799.35 1578,-1436 1478,-1336 1478,-1083 1576,-985 v1(1576,-703) ; v1(1576,366) 1576,927 v1(1644.8,995.8)
FAULT_DB_F: P10.145 U12.10 | length 637.8
  Bottom Layer w10: U12.10@677.82,462.5 677.82,420.84 680.64,418.02 791.06,418.02 867.03,494 1174.66,494 P10.145@1221.81,541.15
GND: C1.2 C2.2 C3.1 C4.2 C5.2 C6.2 C14.1 C15.1 C16.1 C17.1 C18.2 C19.1 C20.1 C21.1 C22.1 C23.1 C24.1 C25.1 C26.1 C27.1 C28.1 C29.1 C30.1 C31.1 C32.1 C33.1 C34.1 C36.1 C37.1 C38.1 C39.1 C40.2 C41.1 C43.1 C44.2 C45.1 C46.1 C47.2 C49.1 C50.1 C51.2 C52.2 C53.2 C54.2 C55.2 C56.2 C57.2 C58.2 C59.2 C60.2 C61.2 C62.2 C63.2 C64.2 C65.2 C66.2 C67.2 C69.2 C70.2 C71.2 C72.2 C73.2 C74.2 C76.1 C77.1 C78_1.1 C78_2.1 C78_3.1 C78_4.1 C78_d.1 C79_1.1 C79_2.1 C79_3.1 C79_4.1 C79_d.1 C80_1.1 C80_2.1 C80_3.1 C80_4.1 C80_d.1 C81_1.1 C81_2.1 C81_3.1 C81_4.1 C81_d.1 D4.1 DS4.2 JP1.2 JP51.1 JP51.3 JP51.5 JP51.7 JP53.3 JP54.2 P1.1 P2.1 P3.1 P4.1 P5.1 P5d.5 P7.1 P10.22 P10.51 P10.53 P10.54 P10.97 P10.150 P11.1 P14.2 P14.6 P15.1 P16.1 P17.1 P18.1 P19.1 P20.1 P25.8 P51.6 P52.6 P53.6 P54.6 Q2.2 Q3.2 R4.2 R7.2 R8.2 R14.1 R48.2 R94.1 R105_1.1 R105_2.1 R105_3.1 R105_4.1 R105_d.1 R184.2 R190.1 R191.1 U1.3 U1.6 U1_1.3 U1_1.4 U1_1.5 U1_2.3 U1_2.4 U1_2.5 U1_3.3 U1_3.4 U1_3.5 U1_4.3 U1_4.4 U1_4.5 U1_11.4 U1_12.4 U1_13.4 U1_21.4 U1_22.4 U1_23.4 U1_31.4 U1_32.4 U1_33.4 U1_41.4 U1_42.4 U1_43.4 U1_d1.4 U1_d2.4 U1_d3.4 U1_d.3 U1_d.4 U1_d.5 U2.7 U3.2 U3.4 U3.8 U3.10 U3.14 U4.3 U4.6 U6.8 U7.7 U8.1 U8.7 U9.7 U10.7 U11.7 U11.8 U12.7 U13.7 U14.1 U14.7 U15.7 U15.13 U16.7 U17.3 U17.4 U17.5 U17.8 U18.3 U18.5 U18.6 U19.2 U19.4 U20.3 U21.7 U22.12 U23.2 U23.4 U51.4 | length 16501.3
  Top Layer w10: DS4.2@-2816,-694 -2816,-757 v1(-2785,-788) ; R105_1.1@-2785,1312.5 v1(-2785,1364) ; v1(-2693,-1158) -2693,-1160.15 P4.1@-2640.57,-1212.57 ; v1(-2459,-748) -2437,-770 R184.2@-2387,-770 ; U1_42.4@-2343,-188 -2343,-123.94 v1(-2317,-97.94) ; U1_43.4@-2130,-188 -2130,-126 v1(-2102,-98) ; R7.2@-2009,923 -1991.4,905.4 Q3.2@-1991.4,842.49 ; U51.4@-1988,-772 -1986.5,-770.5 v1(-1986.5,-741) ; U1_41.4@-1918,-188 -1865,-188 ; C29.1@-1899,-1069 -1899,-1037 -1871,-1009 v1(-1777,-1009) ; v1(-1865,-237.27) -1865,-188 ; R105_4.1@-1807.73,-175.4 -1820.33,-188 -1865,-188 ; v1(-1533,149) -1485,197 C58.2@-1482,197 ; C64.2@-1384,-104 -1335.13,-104 C60.2@-1298,-66.87 -1250.87,-66.87 v1(-1229,-45) ; U19.2@-1323.25,-1163 U19.4@-1214,-1163 ; v1(-1238,2028) C3.1@-984,2028 ; v1(-1230.5,444.45) U21.7@-1230.5,514.23 ; C17.1@-1212,-893 -1142,-893 C16.1@-1140,-895 v1(-1035,-895) ; v1(-901,-1479) C39.1@-901,-1408 ; v1(-636,-1014) -623.64,-1026.36 U6.8@-565,-1026.36 ; U17.8@-595,-1357.36 -642.64,-1357.36 v1(-661,-1339) -661,-1281 -635,-1255 U17.4@-595,-1255 ; U17.5@-595,-1280.59 U17.4@-595,-1255 ; U17.3@-595,-1229.41 U17.4@-595,-1255 ; v1(-508,469) -508,496.23 U7.7@-493,511.23 ; v1(-488.68,-484.32) U22.12@-378.5,-484.32 ; v1(-196,-879) -196,-867 C38.1@-154,-825 ; P5d.5@35,1883.58 P5d.5@58.27,1883.58 ; v1(171,-22.14) C53.2@171,-155 243,-155 C55.2@246,-158 ; v1(173,1586.96) U1_d3.4@262,1586.96 ; v1(202,1176) 225.04,1152.96 U1_d1.4@262,1152.96 ; C66.2@232,-672 249,-672 v1(285,-708) ; U1_d2.4@262,1369.96 346.04,1369.96 v1(360,1356) v1@362,1354 ; C52.2@430,448 v1(509,448) ; v1(498,-1009) 530,-1041 C57.2@530,-1129.28 530,-1278 C63.2@522,-1286 534,-1286 C24.1@596,-1348 ; U2.7@521,679.95 v1(521,713) ; C59.2@657,-427 724,-427 v1(727,-430) ; U16.7@778.77,-146 778.77,-104.23 ; U9.7@787.59,-881 808,-881 v1(828,-861) ; R105_d.1@854,1212 854,1180.11 866.11,1168 v1(949,1168) ; C15.1@896.91,-1141.72 930.72,-1141.72 v1(956,-1167) ; v1(912,636) 867,591 C31.1@842,591 931,502 C20.1@931,474 ; U1_21.4@1676.34,1134 1676.34,1066.66 v1(1702,1041) ; U1_23.4@1676.34,1349.7 1759.3,1349.7 v1(1777,1332) ; U1_22.4@1676.34,1567 1759,1567 v1(1778,1548) ; v1(1751,439.73) 1788.87,477.6 U1_31.4@1831,477.6 ; v1(2023,375) 2053.36,405.36 U1_33.4@2053.36,475.61 ; v1(2248,379) 2276,407 U1_32.4@2276,475.61 ; R105_3.1@2354.5,-450.06 2394.94,-450.06 v1(2422,-423) ; P2.1@2633,809.79 v1(2737.21,809.79) ; P3.1@2635.2,-1424.7 v1(2749.3,-1424.7) ; v1(2717,1393) R105_2.1@2717,1449.5
  Top Layer w15: v3(-2803.79,1007.21) P1.1@-2643,1007.21 ; v3(-2051,842.49) Q3.2@-1991.4,842.49 ; P51.6@-1559.73,1883.58 -1540.34,1864.19 U1_13.4@-1540.34,1782.64 ; U1_11.4@-1540.34,1337.36 -1456.36,1337.36 v3(-1442,1323) ; U1_12.4@-1540.34,1560 -1436.42,1560 -1385.42,1509 v3(-1347.5,1509)
  Top Layer w20: C26.1@1763,-1613 1763,-1884 C73.2@1894,-2015
  Bottom Layer w10: C46.1@-2824,-1260 -2795,-1260 v1(-2693,-1158) ; v1(-2785,1364) -2770,1379 C78_1.1@-2746.67,1379 ; v3(-2679.5,1763.5) -2624.83,1818.17 C43.1@-2600.83,1818.17 ; P16.1@-2589,-988 P16.1@-2546.4,-1030.6 ; v1(-2561,-575.5) C81_4.1@-2443.04,-575.5 ; C77.1@-2546.4,-1215 C76.1@-2546.4,-1131 P16.1@-2546.4,-1030.6 ; P16.1@-2546.4,-993.6 P16.1@-2546.4,-1030.6 ; R94.1@-2374.4,-1310 -2374.4,-1360 v1(-2372,-1360) ; U1_4.3@-2283.04,-359 U1_4.4@-2233.04,-359 U1_4.4@-2233.04,-359 v1(-2233,-423) ; JP53.3@-2281,-1697 JP53.3@-2274,-1690 -2194,-1690 C41.1@-2191,-1693 ; U1_4.5@-2233.04,-567.66 -2216.38,-551 -2158.5,-551 v1(-2158.5,-670.5) -2097,-609 C78_4.1@-2097,-602.28 ; U23.2@-2198.25,-1261 v1(-2089,-1261) ; v1(-1777,-1009) -1701,-1009 U11.7@-1660,-1050 ; C36.1@-1714,-1485 -1714,-1574.04 P10.54@-1710.19,-1577.85 ; v1(-1639,-765) -1606,-765 -1541,-830 C33.1@-1541,-850 ; U13.7@-1609.5,667.77 -1603.23,667.77 -1578,693 v1(-1574,693) ; v1(-1584.5,816) C21.1@-1526,816 ; U11.8@-1440,-1050 v1(-1440,-993) ; C62.2@-1297,-30 -1282,-45 v1(-1229,-45) ; v1(-1248,-138) -1207,-179 C34.1@-1207,-195 ; v1(-1238,2028) -1193,1983 C18.2@-1059,1983 ; v1(-1219,-1192) -1219,-1130 -1194,-1105 C14.1@-1194,-1092 ; U18.3@-1060,1176.66 -1060,1148 -1010,1098 v1(-805,1098) ; v1(-1035,-895) U1.6@-929,-1001 ; U10.7@-873.5,665.36 -864,674.86 v1(-864,695) ; C27.1@-812,-802 -929,-919 U1.6@-929,-1001 ; U1.3@-684,-1013 U1.6@-929,-1013 U1.6@-929,-1001 ; JP1.2@-640.51,1890.2 -640.51,1683.59 D4.1@-439,1482.08 -411,1510.08 v1(-411,1675) ; C22.1@-518,756 -518,739 -508,729 v1(-508,469) C54.2@-508,405 -508,333 C44.2@-507,332 ; v1(-497.59,-1280.59) R8.2@-454,-1237 ; C6.2@-459,-841 -444,-841 v1(-382,-779) ; C5.2@-439,-2013 v1@-361,-2013 ; v1(-310,1333) -273,1370 C79_d.1@-103,1370 -103,1425 -115.66,1437.66 ; v1(-258,450) C25.1@-141,450 -141,484.23 U14.1@-107,518.23 ; v1(-250,1751) C80_d.1@-133,1751 C81_d.1@-133,1695 ; C78_d.1@-150,1434 -119.32,1434 -115.66,1437.66 ; U1_d.5@-115.66,1485 -115.66,1437.66 ; U14.7@-107,671.77 v1(-74.07,704.7) ; C30.1@-20,2006.96 -20,1961.85 P5d.5@58.27,1883.58 ; v1(37,1535) U1_d.3@93,1535 U1_d.4@93,1485 ; C37.1@413.17,-1466.19 413.17,-1501.17 438,-1526 438,-1626.04 P10.97@489.81,-1677.85 ; R191.1@591,799 602,788 U20.3@712.52,788 v1(783,788) ; v1(600,-533) 615.05,-533 U8.7@631.05,-517 ; v1(603,288) 626.64,264.36 U12.7@626.64,234 ; U15.13@659.64,-1282 v1(659.64,-1200.36) 694.14,-1200.36 787.59,-1106.91 U15.7@787.59,-1053.5 v1(827,-1053.5) ; U8.1@784.59,-517 784.59,-574.09 v1(786,-575.5) ; C47.2@910,909 910,992 v1(950,1032) ; v1(937,-1741) R48.2@1021,-1741 ; U4.3@1211,-1519 v1(1211,-1444) ; C78_2.1@1258,1271 1258,1289.16 C79_2.1@1302.5,1333.66 1295.34,1340.82 U1_2.5@1295.34,1406 1347.04,1406 1361.04,1420 v1(1363,1420) ; C69.2@1270,-1746 1415.48,-1746 C67.2@1415.98,-1746.5 1474.5,-1746.5 v1(1475,-1746) ; v1(1272,1768) 1283,1757 C80_2.1@1283,1686 1283,1630.8 C81_2.1@1281.84,1629.64 ; v1(1443,1470) 1456,1470 1470,1456 U1_2.3@1504,1456 U1_2.4@1504,1406 ; C78_3.1@1842,859 1840.74,859 v1(1794.68,812.94) C79_3.1@1905.63,812.94 1945.99,812.94 U1_3.5@1976,842.94 ; U1_3.4@1976,634.28 U1_3.3@2026,634.28 v1(2026,691.37) ; C81_3.1@2188,861.94 2244,861.94 C80_3.1@2245,860.94 v1(2300.06,860.94) ; Q2.2@2308.4,-877.76 2316,-870.16 R4.2@2316,-797 ; C19.1@2321,-700 2321,-792 R4.2@2316,-797 ; v1(2483,-762) 2448,-797 R4.2@2316,-797 ; v1(2737.21,809.79) 2771.79,809.79 2811,849 C28.1@2821,849 ; v1(2749.3,-1424.7) 2790,-1384 C50.1@2833.06,-1384
  Bottom Layer w15: C79_1.1@-2708,1311.5 -2708,1451 U1_1.5@-2710,1453 v3(-2572,1453) U1_1.4@-2501.34,1453 ; C81_1.1@-2680.5,1669 -2679.5,1670 C80_1.1@-2679.5,1728 v3(-2679.5,1763.5) ; v3(-1347.5,1509) -1286.5,1570 U18.6@-1060,1570 -1193.86,1436.14 U18.5@-1193.86,1176.66
  Bottom Layer w20: v1(-2550,-1580.8) C23.1@-2550,-1497 ; C6.2@-459,-841 -459,-983 C40.2@-454,-988
  Bottom Layer w30: U1_1.4@-2501.34,1453 U1_1.3@-2501.34,1503
  other v1: 904,-2019 -244,-2016 1037,-2016 1963,-2016 -189,-2013 -68.72,-2013 -361,-2011 850,-2011 1825,-2011 717,-2008 2023,-1896 2108,-1895 1267,-1239 1151,-1238 -1914,-1222 510,-634 976,-381 780,-95 288,758 -2808,972 -281,1267 -440,1442 -441,1515
  other v2: 1802,-2457 1757,-2442 1847,-2442 1732,-2412 1877,-2412 1717,-2372 1887,-2372 1732,-2332 1872,-2332 1762,-2302 1842,-2302 1802,-2287 -946,-2284 -991,-2269 -901,-2269 -1016,-2239 -871,-2239 -1031,-2199 -861,-2199 -1016,-2159 -876,-2159 -986,-2129 -906,-2129 -946,-2114 -2589,-1073 2596,-1068 -2634,-1058 -2544,-1058 2551,-1053 2641,-1053 -2659,-1028 -2514,-1028 2526,-1023 2671,-1023 -2674,-988 -2504,-988 2511,-983 2681,-983 -2659,-948 -2519,-948 2526,-943 2666,-943 -2629,-918 -2549,-918 2556,-913 2636,-913 -2589,-903 2596,-898 2736,423 -2729,427 2691,438 2781,438 -2774,442 -2684,442 2666,468 2811,468 -2799,472 -2654,472 2651,508 2821,508 -2814,512 -2644,512 2666,548 2806,548 -2799,552 -2659,552 2696,578 2776,578 -2769,582 -2689,582 2736,593 -2729,597
Hin_11: R32.7 U1_11.2 | length 2254.5
  Top Layer w10: v1(-1690,879.28) -1690,590.3 -1671.7,572 -1671,572 -1656,557 -1656,530.3 -1657,529.3 -1657,-4.94 -1656,-5.94 -1656,-11 -1579,-88 -1579,-88.6 -1566.7,-100.9 -1566.1,-100.9 v1(-1556,-111) ; U1_11.2@-1540.34,1237.36 -1446,1237.36 -1430,1221.36 v1@-1430,1171 ; R32.7@-1146,9 -1146,-24 v1(-1144,-26)
  Bottom Layer w10: v1(-1690,879.28) -1714,903.28 -1714,1063 -1674,1103 -1499,1103 v1(-1431,1171) ; v1(-1556,-111) -1168.59,-111 -1144,-86.41 v1(-1144,-26)
Hin_12: R33.3 U1_12.2 | length 1699.5
  Top Layer w10: v1(-1541,882) -1541,698 -1506,663 v1(-1506,470) ; U1_12.2@-1540.34,1460 -1399,1460 -1365,1426 v1(-1365,1196)
  Bottom Layer w10: v1(-1541,882) -1519,904 -1519,1032.07 -1482.39,1068.68 -1439.32,1068.68 -1365,1143 v1(-1365,1196) ; v1(-1506,470) -1386,470 -1197,281 R33.3@-1142.8,281
Hin_13: R33.7 U1_13.2 | length 1629
  Top Layer w10: U1_13.2@-1540.34,1682.64 -1448.64,1682.64 -1303,1537 -1306,1534 v1(-1306,1242) ; v1(-1338,463) v1(-1338,883.72)
  Bottom Layer w10: v1(-1338,463) -1224,349 -1143.8,349 R33.7@-1142.8,348 ; v1(-1338,883.72) -1306.72,915 -1306.72,1241.28 v1(-1306,1242)
Hin_21: R19.2 U1_21.2 | length 422.5
  Top Layer w10: R19.2@1489,995.8 1486,998.8 1486,1221.5 1498.5,1234 U1_21.2@1676.34,1234
Hin_22: R20.6 U1_22.2 | length 951.6
  Top Layer w10: v1(1341,1129) 1341,1560 1448,1667 U1_22.2@1676.34,1667 ; R20.6@1352,995.8 1352.43,996.23 1352,996.66 1354,998.66 v1(1354,1040)
  Bottom Layer w10: v1(1341,1129) 1341,1051 1352,1040 v1(1354,1040)
Hin_23: R20.2 U1_23.2 | length 802.1
  Top Layer w10: R20.2@1285,995.8 1285,1065 1307,1087 1425,1087 1432,1094 1432,1405 1476.7,1449.7 U1_23.2@1676.34,1449.7
Hin_31: R24.6 U1_31.2 | length 2224.1
  Top Layer w10: R24.6@395,61.8 397,63.8 v1(397,122) ; v1(574,228) 842,228 1079,-9 1257,-9 1335,69 1335,342.8 1385.2,393 1582,393 1755,566 1931,566 U1_31.2@1931,477.6
  Bottom Layer w10: v1(397,122) 503,228 v1(574,228)
Hin_32: R30.4 U1_32.2 | length 1306.3
  Top Layer w10: v1(1752,658) 2365,658 2376,647 U1_32.2@2376,475.61
  Bottom Layer w10: R30.4@1623.8,240 1684,240 1711,267 1711,282.96 1712,283.96 1712,532 1752,572 v1(1752,658)
Hin_33: R30.8 U1_33.2 | length 929.4
  Top Layer w10: v1(1703,605) 2153.36,605 U1_33.2@2153.36,475.61
  Bottom Layer w10: R30.8@1623.8,307 1656,307 1675,326 1675,577 v1(1703,605)
Hin_41: R21.3 U1_41.2 | length 1750.3
  Top Layer w10: U1_41.2@-2018,-188 -2018,-246 -1953,-311 -1591,-311 -1472.5,-429.5 -1286.5,-429.5 -830,27 -635,27 -622,14 R21.3@-622,-11.8
Hin_42: R29.5 U1_42.2 | length 1278.7
  Top Layer w10: U1_42.2@-2443,-188 -2443,-330.04 -2302.04,-471 v1(-1682,-471)
  Bottom Layer w10: v1(-1682,-471) -1682,-330 -1662,-310 R29.5@-1514,-310
Hin_43: R29.1 U1_43.2 | length 842.3
  Top Layer w10: U1_43.2@-2230,-188 -2230,-260 -2106,-384 v1(-1615,-384)
  Bottom Layer w10: v1(-1615,-384) -1521,-384 R29.1@-1514,-377
Hin_d1: R23.2 U1_d1.2 | length 1437
  Top Layer w10: R23.2@-316,350 v1(-269,350) ; v1(-136,350) -135,351 v1(-135,869) ; v1(34,1243) 252.04,1243 U1_d1.2@262,1252.96
  Bottom Layer w10: v1(-269,350) v1(-136,350) ; v1(-135,869) -135,871 -114,892 -114,1200 -71,1243 v1(34,1243)
Hin_d2: R23.6 U1_d2.2 | length 1762.9
  Top Layer w10: R23.6@-316,283 v1(-275,283) ; v1(-182,855) -178.11,851.11 -178.11,586.29 -157,565.18 v1(-157,287) ; v1(-4,1277) -4,1468 -2.04,1469.96 U1_d2.2@262,1469.96
  Bottom Layer w10: v1(-275,283) -161,283 v1(-157,287) ; v1(-182,855) -187,855 -216,884 -216,1132 -71,1277 v1(-4,1277)
Hin_d3: R24.4 U1_d3.2 | length 2709.4
  Top Layer w10: U1_d3.2@262,1686.96 211.77,1686.96 74.73,1824 -48,1824 -123,1749 -123,1292 52,1117 175,1117 222,1070 v1(299,1070) ; v1(264,110) 264,144 248,160 248,814 v1(310,876) ; R24.4@363,61.8 v1(363,109)
  Bottom Layer w10: v1(264,110) 360,110 362,108 v1(363,109) ; v1(299,1070) 353,1070 381.54,1041.46 381.54,895.54 371.62,885.62 319.62,885.62 v1(310,876)
INFRA_SIG_F: P10.39 R5.1 | length 694.4
  Top Layer w10: R5.1@-1911,1105 -1857,1105 -1825,1073 -1311.04,1073 P10.39@-1265.19,1027.15 P10.39@-1265.19,1010.81
INFRAIN: JP1.3 R41.6 R168.1 | length 2107.8
  Top Layer w10: v3(-541.2,1922.2) -541.2,1164.2 v3(-471,1094)
  Bottom Layer w10: JP1.3@-588.07,1920 -590.28,1922.2 v3(-541.2,1922.2) ; v3(-471,1094) -435,1094 -416,1075 -416,866 -393,843 -309,843 -231,765 -70,765 -34,729 -34,516 49.8,432.2 v1(49.8,276)
INFRAIN_F: DS1.2 P10.16 U14.12 | length 1668.7
  Top Layer w10: DS1.2@-191.73,2006.96 -191.73,1252.73 v3(-23.66,1084.66) ; P10.16@-65.19,927.15 -65.19,840.38 13,762.19 v1(13,567)
  Bottom Layer w10: P10.16@-65.19,927.15 -23.66,968.68 v3(-23.66,1084.66) ; v1(13,567) 15.41,569.41 U14.12@118,569.41 U14.12@121.5,569.41
IR+: JP2.1 R1.1 | length 1019.7
  Top Layer w10: JP2.1@-2490.6,1647.53 -2414,1570.93 v1(-2414,1281) ; v1(-2076.04,1011.04) R1.1@-2011,1011 R1.1@-2011,1011
  Bottom Layer w10: v1(-2414,1281) -2414,1249 -2364,1199 -2114,1199 -2076.04,1161.04 v1(-2076.04,1011.04)
IR-: JP2.2 Q3.3 | length 1315.3
  Top Layer w10: JP2.2@-2525.4,1612.73 -2443.04,1530.37 v1(-2443.04,1283.04) ; v1(-2100,828) -2100,773 -2065,738 -1964,738 Q3.3@-1954,748
  Bottom Layer w10: v1(-2443.04,1283.04) -2443.04,1243.04 -2376,1176 -2146,1176 -2100,1130 v1(-2100,828)